# Altium PCB WSON-10_L3.0-W3.0-P0.50-TL-EP.pcbdoc
Units mm, origin at the board's own origin, x right, y up, seen from the top; angles counter-clockwise.
Board outline 32.94 x 29.38 mm, 2 copper layers (Top Layer, Bottom Layer); 1 components, 0 nets, 11 pads, 4 vias.
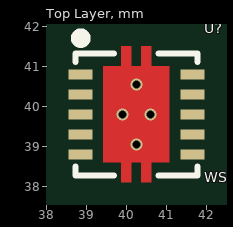
[diagram p0: Top Layer view]
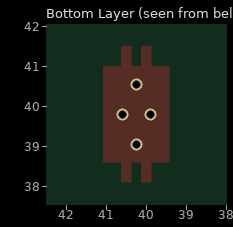
[diagram p1: Bottom Layer view, seen from below]

## Layer stack, top to bottom
Top Layer: signal copper (thickness not stored)
Dielectric: dielectric 0.32, FR-4, Dk 4.8
Bottom Layer: signal copper (thickness not stored)

## Board outline
58.342,25.4 25.4,25.4 25.4,54.778 58.342,54.778

## Components (designator, comment, footprint, x,y, rotation, side; value= is the part's Value field where it differs from the comment)
U? "WSON-10_L3.0-W3.0-P0.50-TL-EP" WSON-10_L3.0-W3.0-P0.50-TL-EP 40.03,39.962 r0 top

## Footprints (in the part's own frame and the unit in brackets; to place one, negate y for a bottom-side part, rotate by r counter-clockwise, add the part's x,y. Pads: shape width x height; smd on the part's side, far side on the other; paste and mask are expansions set on the pad)
WSON-10_L3.0-W3.0-P0.50-TL-EP [mm]
  rect 0.6x0.25 smd: 1(-1.171,0.839) 2(-1.171,0.339) 3(-1.171,-0.162) 4(-1.171,-0.662) 5(-1.171,-1.163) 6(1.63,-1.163) 7(1.63,-0.662) 8(1.63,-0.162) 9(1.63,0.339) 10(1.63,0.839)
  round 0 smd: 11(0.229,-0.162)
  Top Layer region: 0.104,1.538 0.104,1.038 0.354,1.038 0.354,1.538 0.604,1.538 0.604,1.038 1.054,1.038 1.054,-1.362 0.604,-1.362 0.604,-1.862 0.354,-1.862 0.354,-1.362 0.104,-1.362 0.104,-1.862 0.104,-1.862 -0.146,-1.862 -0.146,-1.362 -0.596,-1.362 -0.596,1.038 -0.146,1.038 -0.146,1.538
  silkscreen extent -1.29,-1.69 1.75,1.86

## Via types
v1: diameter 0.3, hole 0.2, Top Layer to Bottom Layer, tented both sides, 4 vias

## Nets (pads, with @x,y where several pads share a name; then routed paths per layer and width w, separated by ;. In a path a pad name is that pad's centre, name@x,y a point inside that pad or via, vN(x,y) a via of type N, cw(c..) or ccw(c..) an arc to the next point about the centre after c; other vN are vias at no path point)
pads on no net: U?.1 U?.2 U?.3 U?.4 U?.5 U?.6 U?.7 U?.8 U?.9 U?.10 U?.11
copper on no net:
  other v1: 40.259,39.05 39.909,39.8 40.609,39.8 40.259,40.55